# Altium PCB AIBoard2.PcbDoc
Units mil, origin at the board's own origin, x right, y up, seen from the top; angles counter-clockwise.
Board outline 3937.01 x 5905.51 mil, 2 copper layers (Top Layer, Bottom Layer); 25 components, 122 nets, 86 pads, 4 vias.
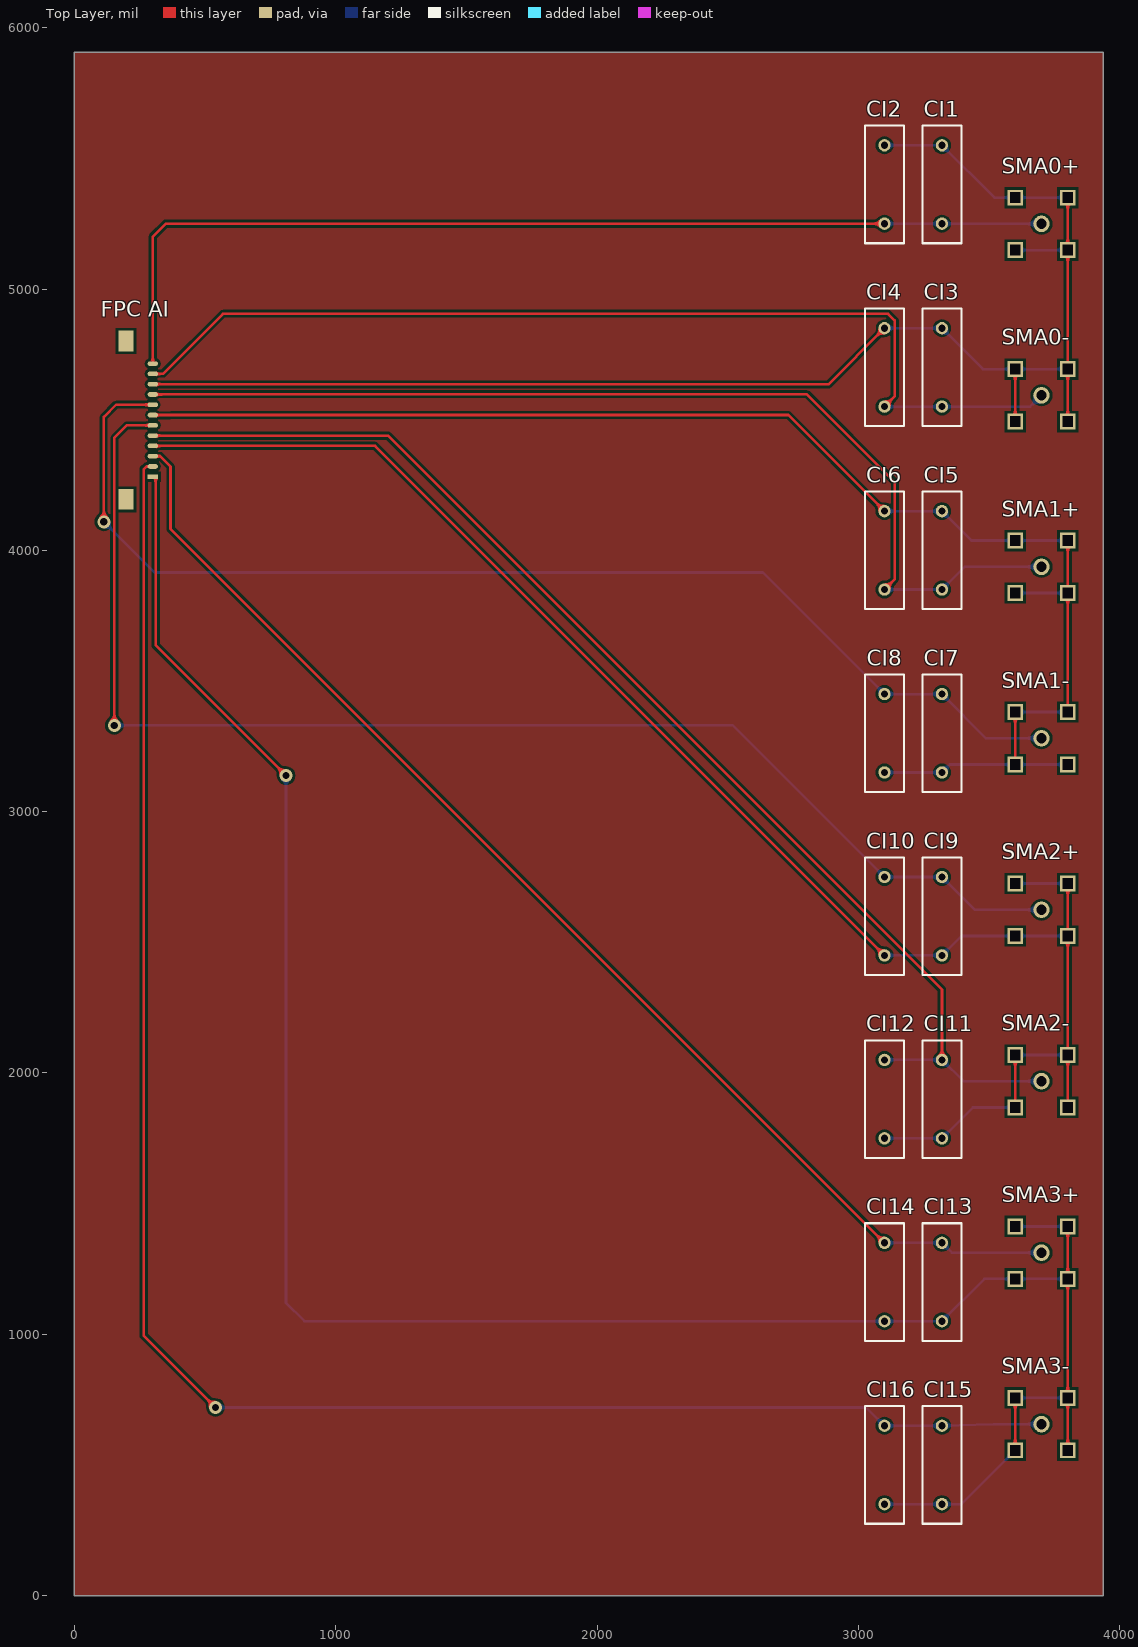
[diagram p0: Top Layer view]
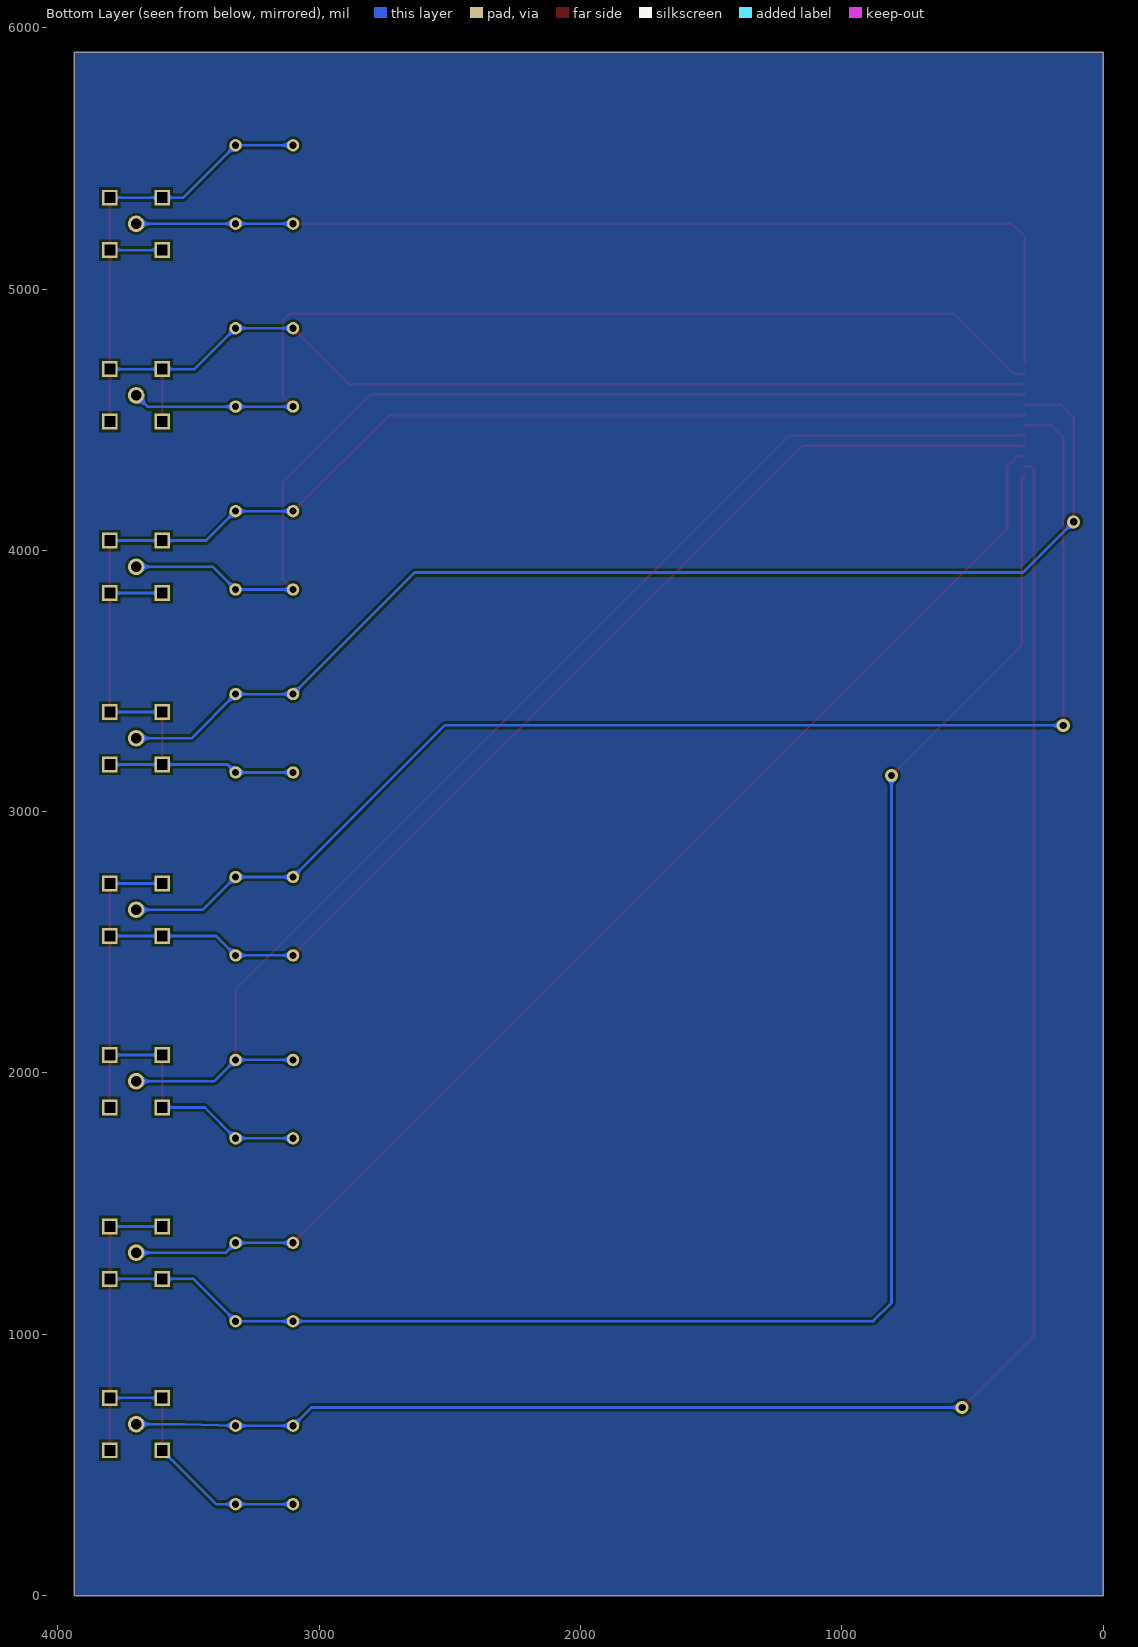
[diagram p1: Bottom Layer view, seen from below]

## Layer stack, top to bottom
Top Solder: solder mask 0.4, Solder Resist, Dk 3.5
Top Layer: signal copper 1.4
Dielectric 1: dielectric 12.6, FR-4, Dk 4.8
Bottom Layer: signal copper 1.4
Bottom Solder: solder mask 0.4, Solder Resist, Dk 3.5

## Board outline
0,0 3937.01,0 3937.01,5905.51 0,5905.51

## Design rules (kind name [scope] priority, off if disabled: settings)
Clearance [All] p1: gap=10 ignorepadtopadclearanceinfootprint=FALSE except(0: Arc-Hole Track-Hole SMDPad-Hole THPad-Hole Via-Hole Fill-Hole Poly-Hole Region-Hole Text-Hole)
PolygonConnect [All] p1: connectstyle=Relief reliefconductorwidth=10 reliefentries=4 polygonreliefangle="90 Angle" airgapwidth=10
RoutingVias [All] p1: holewidth=28 width=50 viastyle="Through Hole" minholewidth=28 minwidth=50 maxholewidth=28 maxwidth=50
SolderMaskExpansion [All] p1: expansion=4
Width [All] p1: maxlimit=10 minlimit=10 preferedwidth=10
30 further rules are at their usual default settings.

## Classes and differential pairs
component class AOBoard: CI1 CI2 CI3 CI4 CI5 CI6 CI7 CI8

## Components (designator, comment, footprint, x,y, rotation, side; value= is the part's Value field where it differs from the comment)
CI1 "Cap" RAD-0.3 3320,5400 r270 top value=100pF
CI2 "Cap" RAD-0.3 3100,5400 r270 top value=100pF
CI3 "Cap" RAD-0.3 3320,4700 r270 top value=100pF
CI4 "Cap" RAD-0.3 3100,4700 r270 top value=100pF
CI5 "Cap" RAD-0.3 3320,4000 r270 top value=100pF
CI6 "Cap" RAD-0.3 3100,4000 r270 top value=100pF
CI7 "Cap" RAD-0.3 3320,3300 r90 top value=100pF
CI8 "Cap" RAD-0.3 3100,3300 r90 top value=100pF
CI9 "Cap" RAD-0.3 3320,2600 r90 top value=100pF
CI10 "Cap" RAD-0.3 3100,2600 r90 top value=100pF
CI11 "Cap" RAD-0.3 3320,1900 r90 top value=100pF
CI12 "Cap" RAD-0.3 3100,1900 r90 top value=100pF
CI13 "Cap" RAD-0.3 3320,1200 r90 top value=100pF
CI14 "Cap" RAD-0.3 3100,1200 r90 top value=100pF
CI15 "Cap" RAD-0.3 3320,500 r90 top value=100pF
CI16 "Cap" RAD-0.3 3100,500 r90 top value=100pF
"FPC AI" "FPC socket 12 pin" "FPC 12pin" 300,4281.5 r180 top
SMA0+ "SMA" SMA 3700.78,5249.34 r0 top
SMA0- "SMA" SMA 3700.78,4593.18 r0 top
SMA1+ "SMA" SMA 3700.78,3937.01 r0 top
SMA1- "SMA" SMA 3700.78,3280.84 r0 top
SMA2+ "SMA" SMA 3700.78,2624.67 r0 top
SMA2- "SMA" SMA 3700.78,1968.5 r0 top
SMA3+ "SMA" SMA 3700.78,1312.34 r0 top
SMA3- "SMA" SMA 3700.78,656.17 r0 top

## Footprints (in the part's own frame and the unit in brackets; to place one, negate y for a bottom-side part, rotate by r counter-clockwise, add the part's x,y. Pads: shape width x height; smd on the part's side, far side on the other; paste and mask are expansions set on the pad)
"FPC 12pin" [mm]
  rect 1x0.45 smd: 1(0,0)
  oval 1x0.45 smd: 2(0,-1) 3(0,-2) 4(0,-3) 5(0,-4) 6(0,-5) 7(0,-6) 8(0,-7) 9(0,-8) 10(0,-9) 11(0,-10) 12(0,-11)
  rect 1.5x2 smd: 13(2.6,-13.2) 14(2.6,2.2)
RAD-0.3 [mm] "Radial Cap, Thru-Hole; 2 Leads; 0.3 in Pin Spacing"
  round 1.2 hole 0.7: 1(-3.81,0) 2(3.81,0)
  silkscreen extent -5.71,-1.91 5.71,1.91
SMA [mm]
  round 1.6 hole 1: 1(0,0)
  rect 1.524x1.524 hole 1 square: 2(-2.55,-2.55) 2(-2.55,2.55) 2(2.55,-2.55) 2(2.55,2.55)

## Part data
CI1 CI2 CI3 CI4 CI5 CI6 CI7 CI8 CI9 CI10 CI11 CI12 CI13 CI14 CI15 CI16: "Capacitor", LatestRevisionDate=17-Jul-2002, LatestRevisionNote="Re-released for DXP Platform.", PackageDescription="Radial Cap, Thru-Hole; 2 Leads; 0.3 in Pin Spacing", PackageReference=RAD-0.3, Published=8-Jun-2000, Publisher="Altium Limited"

## Via types
v1: diameter 50, hole 28, Top Layer to Bottom Layer, 4 vias

## Nets (pads, with @x,y where several pads share a name; then routed paths per layer and width w, separated by ;. In a path a pad name is that pad's centre, name@x,y a point inside that pad or via, vN(x,y) a via of type N, cw(c..) or ccw(c..) an arc to the next point about the centre after c; other vN are vias at no path point)
NetC1_1: 
NetC1_2: 
NetC3_1: 
NetC3_2: 
NetC5_1: 
NetC5_2: 
NetC7_1: 
NetC7_2: 
NetCI1_1: "FPC AI.10" CI1.1 CI2.1 CI3.1 CI4.1 SMA0+.2 SMA0-.2 | length 5698
  Top Layer w10: 300,4635.83 367.17,4635.83 368,4635 2885,4635 CI4.1 ; SMA0-.2@3600.39,4492.78 SMA0-.2@3600.39,4693.57 ; SMA0-.2@3801.17,4492.78 3801.17,4693.57 3801.17,5148.95 SMA0+.2@3801.17,5349.74
  Bottom Layer w10: CI4.1 CI3.1 3476.43,4693.57 3600.39,4693.57 SMA0-.2@3801.17,4693.57 ; CI2.1 CI1.1 3520.26,5349.74 3600.39,5349.74 SMA0+.2@3801.17,5349.74 ; SMA0+.2@3600.39,5148.95 SMA0+.2@3801.17,5148.95
NetCI1_2: "FPC AI.12" CI1.2 CI2.2 SMA0+.1 | length 3907.2
  Top Layer w10: 300,4714.57 300,5200 350,5250 CI2.2
  Bottom Layer w10: CI2.2 CI1.2 3510,5250 3510.66,5249.34 SMA0+.1
NetCI3_2: "FPC AI.11" CI3.2 CI4.2 SMA0-.1 | length 3909.4
  Top Layer w10: 300,4675.2 339,4675.2 568.8,4905 3114,4905 3139,4880 3139,4589 CI4.2
  Bottom Layer w10: CI4.2 CI3.2 3657.6,4550 SMA0-.1
NetCI5_1: "FPC AI.7" CI5.1 CI6.1 CI7.1 CI8.1 SMA1+.2 SMA1-.2 | length 5672.7
  Top Layer w10: 300,4517.72 367.72,4517.72 368,4518 2732,4518 CI6.1 ; SMA1-.2@3600.39,3180.45 SMA1-.2@3600.39,3381.23 ; SMA1-.2@3801.17,3381.23 3801.17,3836.61 SMA1+.2@3801.17,4037.4
  Bottom Layer w10: CI8.1 CI7.1 3350.45,3180.45 3600.39,3180.45 SMA1-.2@3801.17,3180.45 ; CI6.1 CI5.1 3432.6,4037.4 3600.39,4037.4 SMA1+.2@3801.17,4037.4 ; SMA1-.2@3600.39,3381.23 SMA1-.2@3801.17,3381.23 ; SMA1+.2@3600.39,3836.61 SMA1+.2@3801.17,3836.61
NetCI5_2: "FPC AI.9" CI5.2 CI6.2 SMA1+.1 | length 4042.4
  Top Layer w10: 300,4596.46 334.46,4596.46 335,4597 2803,4597 3139,4261 3139,3889 CI6.2
  Bottom Layer w10: CI6.2 CI5.2 3407.01,3937.01 SMA1+.1
NetCI7_2: "FPC AI.8" CI7.2 CI8.2 SMA1-.1 | length 4538.4
  Top Layer w10: v1(113,4109) 113,4510.09 160,4557.09 300,4557.09
  Bottom Layer w10: v1(113,4109) 307,3915 2635,3915 CI8.2 CI7.2 3489.16,3280.84 SMA1-.1
NetCI9_1: "FPC AI.4" CI9.1 CI10.1 CI11.1 CI12.1 SMA2+.2 SMA2-.2 | length 6348.1
  Top Layer w10: 300,4399.61 1150.39,4399.61 CI10.1 ; SMA2-.2@3600.39,1868.11 SMA2-.2@3600.39,2068.9 ; SMA2-.2@3801.17,1868.11 3801.17,2068.9 3801.17,2524.28 SMA2+.2@3801.17,2725.07
  Bottom Layer w10: CI12.1 CI11.1 3438.11,1868.11 SMA2-.2@3600.39,1868.11 ; CI10.1 CI9.1 3394.28,2524.28 3600.39,2524.28 SMA2+.2@3801.17,2524.28 ; SMA2-.2@3600.39,2068.9 SMA2-.2@3801.17,2068.9 ; SMA2+.2@3600.39,2725.07 SMA2+.2@3801.17,2725.07
NetCI9_2: "FPC AI.6" CI9.2 CI10.2 SMA2+.1 | length 5107.8
  Top Layer w10: v1(153,3330) 153,4431.35 200,4478.35 300,4478.35
  Bottom Layer w10: v1(153,3330) 2520,3330 CI10.2 CI9.2 3445.33,2624.67 SMA2+.1
NetCI11_2: "FPC AI.5" CI11.2 CI12.2 SMA2-.1 | length 4801.7
  Top Layer w10: 300,4438.98 1200.02,4438.98 3320,2319 CI11.2
  Bottom Layer w10: CI12.2 CI11.2 3401.5,1968.5 SMA2-.1
NetCI13_1: "FPC AI.1" CI13.1 CI14.1 CI15.1 CI16.1 SMA3+.2 SMA3-.2 | length 8511.4
  Top Layer w10: 300,4281.5 311,4281.5 311,3637 v1(810,3138) ; SMA3-.2@3600.39,555.78 SMA3-.2@3600.39,756.56 ; SMA3-.2@3801.17,555.78 3801.17,756.56 3801.17,1211.94 SMA3+.2@3801.17,1412.73
  Bottom Layer w10: v1(810,3138) 810,1120 880,1050 CI14.1 CI13.1 3481.94,1211.94 3600.39,1211.94 SMA3+.2@3801.17,1211.94 ; CI16.1 CI15.1 3394.61,350 SMA3-.2@3600.39,555.78 ; SMA3-.2@3600.39,756.56 SMA3-.2@3801.17,756.56 ; SMA3+.2@3600.39,1412.73 SMA3+.2@3801.17,1412.73
NetCI13_2: "FPC AI.3" CI13.2 CI14.2 SMA3+.1 | length 4802.7
  Top Layer w10: 300,4360.24 327.76,4360.24 368,4320 368,4082 CI14.2
  Bottom Layer w10: CI14.2 CI13.2 3357.66,1312.34 SMA3+.1
NetCI15_2: "FPC AI.2" CI15.2 CI16.2 SMA3-.1 | length 6933.3
  Top Layer w10: 300,4320.87 275.87,4320.87 265,4310 265,995 v1(540,720)
  Bottom Layer w10: v1(540,720) 3030,720 CI16.2 CI15.2 3516.17,656.17 SMA3-.1
"NetFPC AI1_1": 
"NetFPC AI1_2": 
"NetFPC AI1_3": 
"NetFPC AI1_4": 
"NetFPC AI1_5": 
"NetFPC AI1_6": 
"NetFPC AI1_7": 
"NetFPC AI1_8": 
"NetFPC AI1_9": 
"NetFPC AI1_10": 
"NetFPC AI1_11": 
"NetFPC AI1_12": 
"NetFPC AI2_1": 
"NetFPC AI2_2": 
"NetFPC AI2_3": 
"NetFPC AI2_4": 
"NetFPC AI2_5": 
"NetFPC AI2_6": 
"NetFPC AI2_7": 
"NetFPC AI2_8": 
"NetFPC AI2_9": 
"NetFPC AI2_10": 
"NetFPC AI2_11": 
"NetFPC AI2_12": 
"NetFPC AO_1": 
"NetFPC AO_2": 
"NetFPC AO_3": 
"NetFPC AO_4": 
"NetFPC DIO1_1": 
"NetFPC DIO1_2": 
"NetFPC DIO1_3": 
"NetFPC DIO1_4": 
"NetFPC DIO1_5": 
"NetFPC DIO1_6": 
"NetFPC DIO1_7": 
"NetFPC DIO1_8": 
"NetFPC DIO1_9": 
"NetFPC DIO1_10": 
"NetFPC DIO1_11": 
"NetFPC DIO1_12": 
"NetFPC DIO2_1": 
"NetFPC DIO2_2": 
"NetFPC DIO2_3": 
"NetFPC DIO2_4": 
"NetFPC DIO2_5": 
"NetFPC DIO2_6": 
"NetFPC DIO2_7": 
"NetFPC DIO2_8": 
"NetFPC DIO2_9": 
"NetFPC DIO2_10": 
"NetFPC DIO2_11": 
"NetFPC DIO2_12": 
"NetFPC DIO2__1": 
"NetFPC DIO2__2": 
"NetFPC DIO2__3": 
"NetFPC DIO2__4": 
"NetFPC DIO2__5": 
"NetFPC DIO2__6": 
"NetFPC DIO2__7": 
"NetFPC DIO2__8": 
"NetFPC DIO2__9": 
"NetFPC DIO2__10": 
"NetFPC DIO2__11": 
"NetFPC DIO2__12": 
"NetFPC DIO3_1": 
"NetFPC DIO3_2": 
"NetFPC DIO3_3": 
"NetFPC DIO3_4": 
"NetFPC DIO3_5": 
"NetFPC DIO3_6": 
"NetFPC DIO3_7": 
"NetFPC DIO3_8": 
"NetFPC DIO3_9": 
"NetFPC DIO3_10": 
"NetFPC DIO3_11": 
"NetFPC DIO3_12": 
"NetFPC DIO3__1": 
"NetFPC DIO3__2": 
"NetFPC DIO3__3": 
"NetFPC DIO3__4": 
"NetFPC DIO3__5": 
"NetFPC DIO3__6": 
"NetFPC DIO3__7": 
"NetFPC DIO3__8": 
"NetFPC DIO3__9": 
"NetFPC DIO3__10": 
"NetFPC DIO3__11": 
"NetFPC DIO3__12": 
"NetFPC DIO 1__1": 
"NetFPC DIO 1__2": 
"NetFPC DIO 1__3": 
"NetFPC DIO 1__4": 
"NetFPC DIO 1__5": 
"NetFPC DIO 1__6": 
"NetFPC DIO 1__7": 
"NetFPC DIO 1__8": 
"NetFPC DIO 1__9": 
"NetFPC DIO 1__10": 
"NetFPC DIO 1__11": 
"NetFPC DIO 1__12": 
"NetFPC Other_1": 
"NetFPC Other_2": 
pads on no net: "FPC AI.13" "FPC AI.14"

## Polygon pours and split planes (outlines as drawn)
no net on Drill Drawing (solid): 0,0
no net on Drill Drawing (solid): 0,5905.51 3937.01,5905.51 3937.01,0 0,0
no net on Top Layer (solid, pour order 0): 0,0 3937.01,0 3937.01,5905.51 0,5905.51
no net on Bottom Layer (solid, pour order 2): 0,5905.51 3937.01,5905.51 3937.01,0 0,0

## Silkscreen, mask and mechanical layers (free items; w line width, h text height)
Drill Drawing:
  lines w10: 0,0 0,5905.51 3937.01,5905.51 3937.01,0 1968.5,0 0,0
  text "AI Board 1 V1.0 Ying" at 2730,100 h60